# Allegro board FootPedal.brd
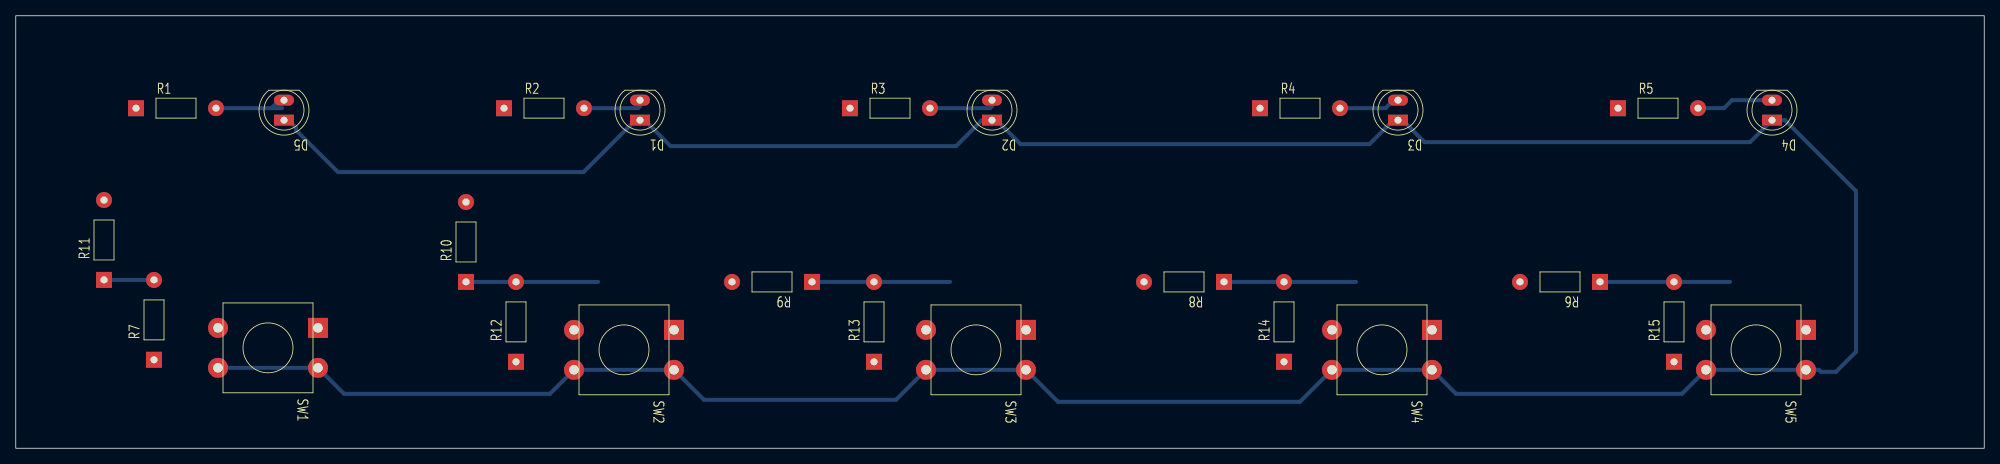
[diagram p0: board, top side]
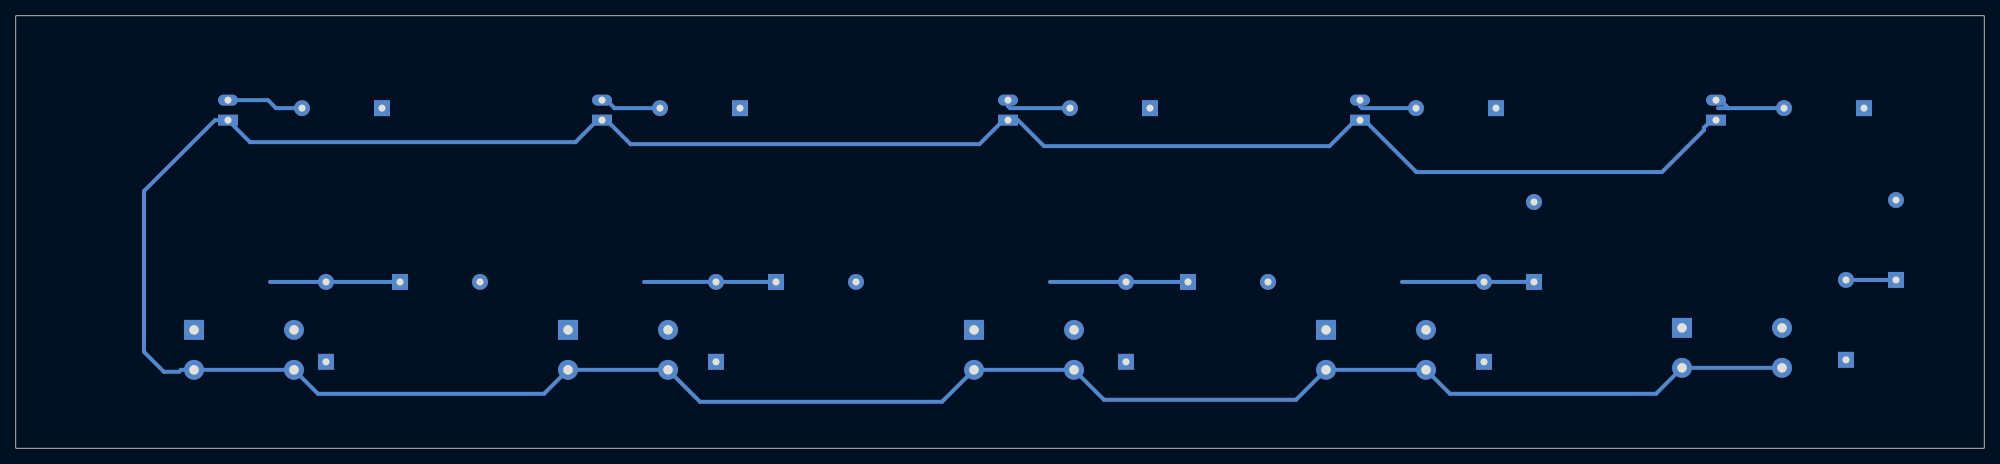
[diagram p1: board, bottom side, seen from below]

Outline 250 x 55 mm; copper layers: TOP, BOTTOM. Coordinates in mm from the lower left corner of the outline.
Outline path: rectangle 0,0 250,55

## Design rules (mm)
constraint set DEFAULT: min track width 0.508

## Placement (name value [footprint] x y rotation side)
D1  LED  [GU-LED5MM]  79.28 41.72 180 top
D2  LED  [GU-LED5MM]  123.98 41.72 180 top
D3  LED  [GU-LED5MM]  175.55 41.72 180 top
D4  LED  [GU-LED5MM]  223.04 41.72 180 top
D5  LED  [GU-LED5MM]  34.07 41.72 180 top
R1  330R  [GU-RC400]  15.27 43.25 0 top
R2  330R  [GU-RC400]  62.01 43.25 0 top
R3  330R  [GU-RC400]  105.95 43.25 0 top
R4  330R  [GU-RC400]  158.02 43.25 0 top
R5  330R  [GU-RC400]  203.49 43.25 0 top
R6  1K  [GU-RC400]  201.2 21.15 180 top
R7  10K  [GU-RC400]  17.56 11.24 90 top
R8  1K  [GU-RC400]  153.45 21.15 180 top
R9  1K  [GU-RC400]  101.12 21.15 180 top
R10  1K  [GU-RC400]  57.18 21.15 90 top
R11  1K  [GU-RC400]  11.21 21.4 90 top
R12  10K  [GU-RC400]  63.53 10.99 90 top
R13  10K  [GU-RC400]  109 10.99 90 top
R14  10K  [GU-RC400]  161.07 10.99 90 top
R15  10K  [GU-RC400]  210.6 10.99 90 top
SW1  Pushbutton-4pin  [GU-PUSH52]  38.39 15.31 270 top
SW2  Pushbutton-4pin  [GU-PUSH52]  83.6 15.05 270 top
SW3  Pushbutton-4pin  [GU-PUSH52]  128.3 15.05 270 top
SW4  Pushbutton-4pin  [GU-PUSH52]  179.86 15.05 270 top
SW5  Pushbutton-4pin  [GU-PUSH52]  227.36 15.05 270 top

## Library data of the parts
D1-D5 = LED
R1-R15 = RESISTOR_1
SW1-SW5 = Pushbutton-4pin

## Footprints (pads in the part's own frame, mm; a bottom-side part is the same pattern mirrored in y, then rotated)
GU-LED5MM
  rect 2.54x1.397 hole 0.889: 1(0,0)
  oval 2.54x1.397 hole 0.889: 2(0,-2.54)
GU-PUSH52
  rect 2.54x2.54 hole 1.194: 1(0,0)
  round 2.54 hole 1.194: 2(5.08,0) 3(0,-12.7) 4(5.08,-12.7)
GU-RC400
  rect 2.032x2.032 hole 0.889: 1(0,0)
  round 2.032 hole 0.889: 2(10.16,0)

## Nets
3V3: R7.1 R12.1 R13.1 R14.1 R15.1
GND: D1.1(CATHODE) D2.1(CATHODE) D3.1(CATHODE) D4.1(CATHODE) D5.1(CATHODE) SW1.2 SW1.4 SW2.2 SW2.4 SW3.2 SW3.4 SW4.2 SW4.4 SW5.2 SW5.4
GPIO15: R8.1 R14.2 SW4.1 SW4.3
GPIO 14: R6.1 R15.2 SW5.1 SW5.3
GPIO 18: R9.1 R13.2 SW3.1 SW3.3
GPIO 23: R10.1 R12.2 SW2.1 SW2.3
GPIO 24: R7.2 R11.1 SW1.1 SW1.3
GPIO PINS: R1.1 R2.1 R3.1 R4.1 R5.1
N00282: D5.2 R1.2
N00301: D1.2 R2.2
N00309: D2.2 R3.2
N00319: D3.2 R4.2
N00325: D4.2 R5.2

Pads without a net: R6 2; R8 2; R9 2; R10 2; R11 2

## Routing (per net, layer and track width the routed paths; a pad name or vN(x,y) marks a point on that pad's centre or on a via; arc(x,y) is an arc through that point)
GND: length 458.2
  BOTTOM w0.508: 33.81,41.72 D5.1 34.64,41.72 35.61,40.76 35.61,40.44 40.93,35.12 72.1,35.12 78.71,41.72 D1.1 79.85,41.72 83.15,38.42 119.41,38.42 122.71,41.72 D2.1 124.56,41.72 127.6,38.68 171.93,38.68 174.97,41.72 D3.1 176.12,41.72 178.91,38.93 220.25,38.93 D4.1 224.7,41.72 233.71,32.71 233.71,12.26 231.17,9.72 229.27,9.72 229.01,9.97 SW5.2 SW5.4 211.61,6.93 182.91,6.93 SW4.2 SW4.4 163.1,5.91 132.37,5.91 SW3.2 SW3.4 111.79,6.16 87.41,6.16 SW2.2 SW2.4 67.85,6.93 41.69,6.93 SW1.2 SW1.4
GPIO15: length 16.8
  BOTTOM w0.508: 170.21,21.15 R14.2 R8.1
GPIO 14: length 16.5
  BOTTOM w0.508: R6.1 R15.2 217.71,21.15
GPIO 18: length 17.5
  BOTTOM w0.508: 118.65,21.15 R13.2 R9.1
GPIO 23: length 16.8
  BOTTOM w0.508: R10.1 R12.2 73.95,21.15
GPIO 24: length 6.4
  BOTTOM w0.508: R11.1 R7.2
N00282: length 10.4
  BOTTOM w0.508: 33.81,43.25 32.48,43.25 ; 32.48,43.25 33.5,44.26 D5.2 ; 32.48,43.25 R1.2
N00301: length 8
  BOTTOM w0.508: D1.2 79.28,43.5 79.03,43.25 R2.2
N00309: length 8.7
  BOTTOM w0.508: D2.2 123.98,43.5 123.73,43.25 R3.2
N00319: length 7.8
  BOTTOM w0.508: D3.2 174.97,44.26 173.96,43.25 R4.2
N00325: length 9.8
  BOTTOM w0.508: R5.2 216.95,43.25 217.96,44.26 D4.2
